# Altium PCB 最小系统.PcbDoc
Units mil, origin at the board's own origin, x right, y up, seen from the top; angles counter-clockwise.
Board outline 1430 x 800 mil, 2 copper layers (Top Layer, Bottom Layer); 28 components, 48 nets, 146 pads, 24 vias.
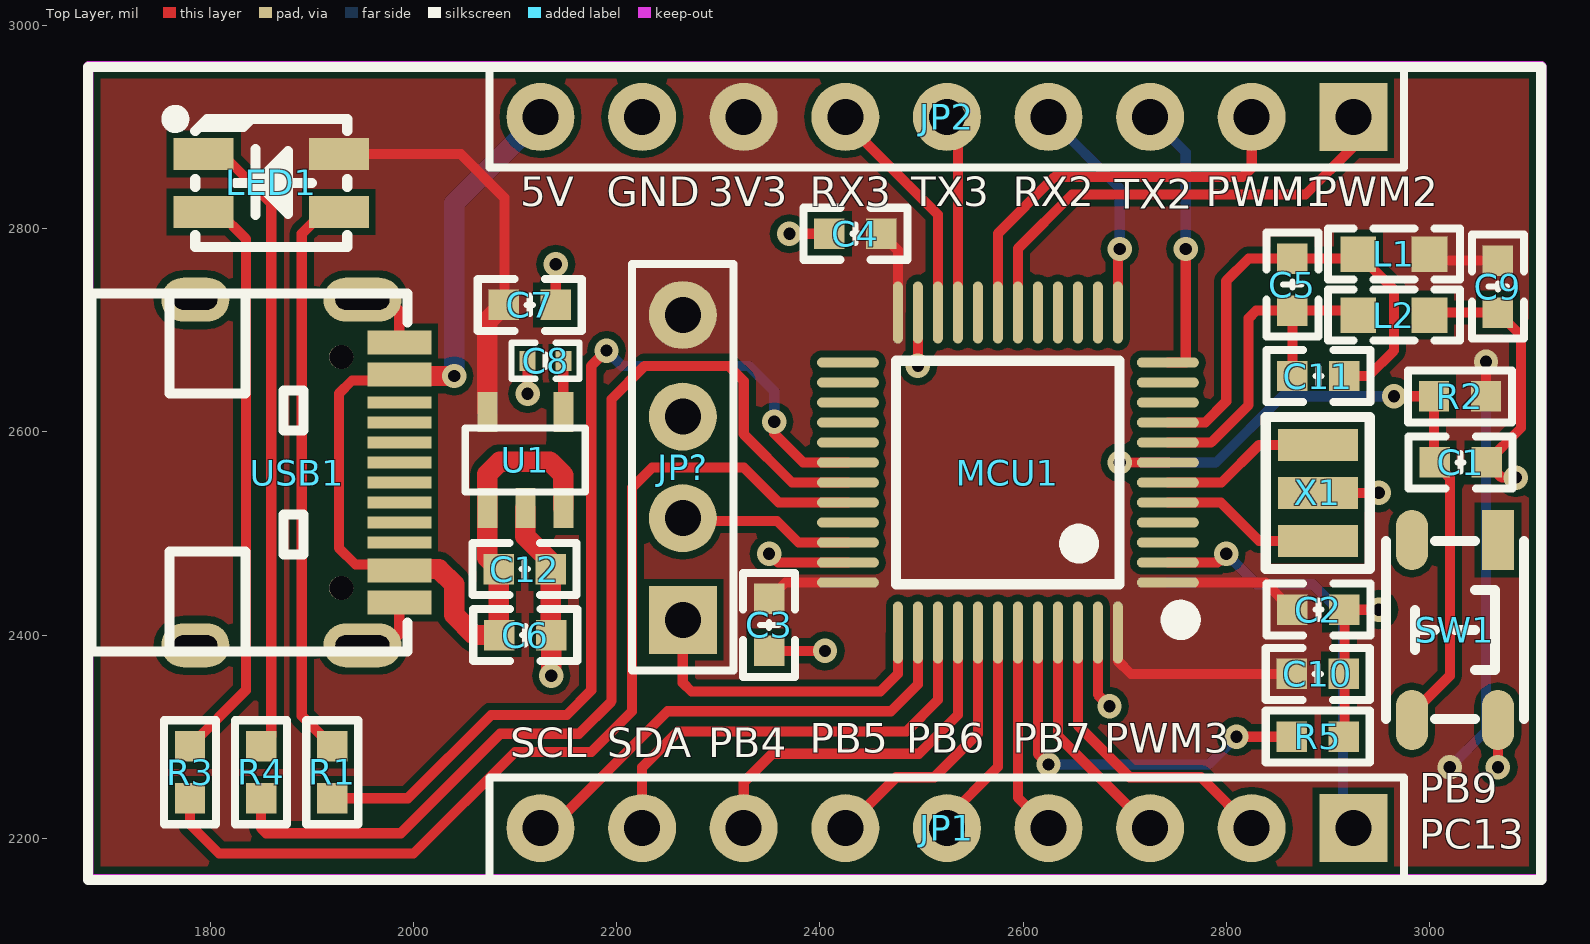
[diagram p0: Top Layer view]
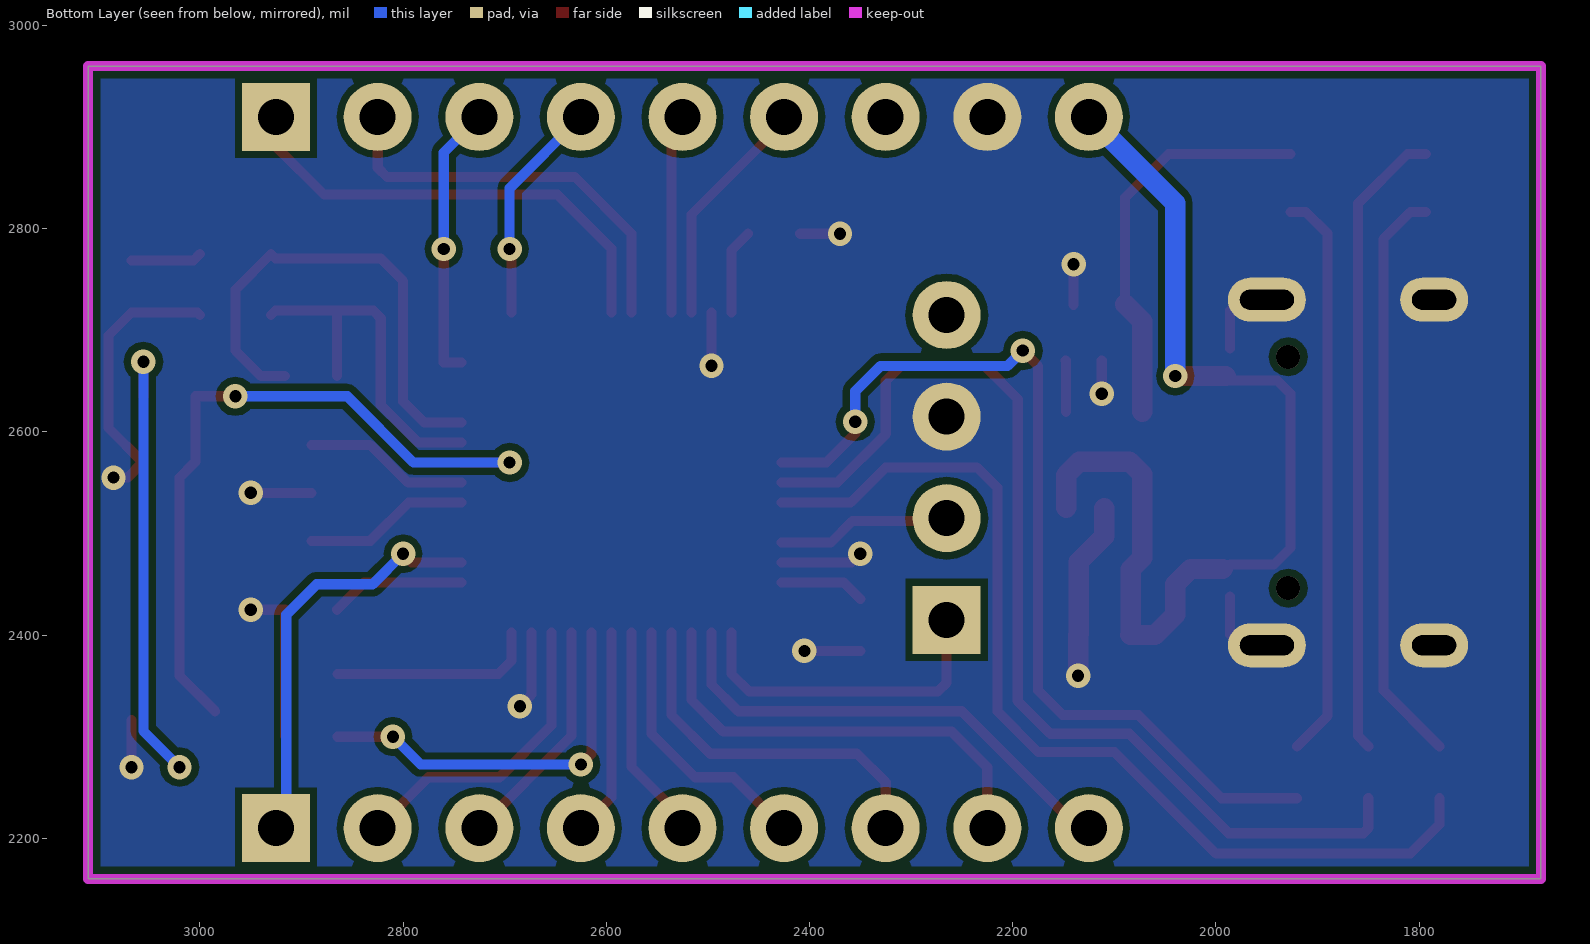
[diagram p1: Bottom Layer view, seen from below]

## Layer stack, top to bottom
Top Solder: solder mask 0.4, Solder Resist, Dk 3.5
Top Layer: signal copper 1.4
Dielectric 1: dielectric 12.6, FR-4, Dk 4.8
Bottom Layer: signal copper 1.4
Bottom Solder: solder mask 0.4, Solder Resist, Dk 3.5

## Board outline
1680,2160 1680,2960 3110,2960 3110,2160

## Design rules (kind name [scope] priority, off if disabled: settings)
Clearance [All] p1: gap=7 ignorepadtopadclearanceinfootprint=TRUE
PlaneConnect [All] p1: planeconnectstyle=Direct reliefexpansion=20 reliefentries=4 reliefconductorwidth=10 reliefairgap=10
PolygonConnect [All] p1: connectstyle=Direct reliefconductorwidth=10 reliefentries=4 polygonreliefangle="90 Angle" airgapwidth=10
RoutingVias [All] p1: holewidth=28 width=50 viastyle="Through Hole" minholewidth=28 minwidth=50 maxholewidth=28 maxwidth=50
SolderMaskExpansion [All] p1: expansion=4
Width [All] p1: maxlimit=1000 minlimit=10 preferedwidth=10 toplayer_maxwidth=100 minimp=50.000000 maximp=50.000000 favimp=50.000000
29 further rules are at their usual default settings.

## Components (designator, comment, footprint, x,y, rotation, side; value= is the part's Value field where it differs from the comment)
C1 "100nF/50V" "C 0603_L" 3030.59,2570 r0 top
C2 "4.7μF/35V" "C 0603_L" 2890.59,2425 r180 top
C3 "100nF/50V" "C 0603_L" 2350,2410 r90 top
C4 "100nF/50V" "C 0603_L" 2435,2795 r0 top
C5 "1μF/50V" "C 0603_L" 2865,2745 r90 top
C6 "1uF" "C 0603_L" 2110,2400 r0 top
C7 "1uF" "C 0603_L" 2114.41,2725 r0 top
C8 "22nF" "C 0402_L" 2130,2670 r180 top
C9 "1μF/50V" "C 0603_L" 3067.32,2743.06 r90 top
C10 "100nF/50V" "C 0603_L" 2890,2361.73 r180 top
C11 "100nF/50V" "C 0603_L" 2890.59,2655 r0 top
C12 "100nF/50V" "C 0603_L" 2109.41,2465 r0 top
JP1 "HDR-1X9" HDR2.54-LI-9P 2525,2210 r180 top locked
JP2 "HDR-1X9" HDR2.54-LI-9P 2525,2910 r180 top locked
JP? "HDR-1X4" HDR2.54-LI-4P 2265,2565 r90 top
L1 "0Ω" "L 0603" 2965,2775 r0 top
L2 "0Ω" "L 0603" 2965,2715 r0 top
LED1 "RGB" "LED 3528-RGB" 1860,2845 r0 top
MCU1 "STM32F103C8T6" "LQFP48 7X7_L" 2585,2560 r90 top
R1 "2K" "R 0603_L" 1920,2265 r90 top
R2 "10k" "R 0603_L" 3030,2635 r0 top
R3 "2K" "R 0603_L" 1780,2265 r90 top
R4 "2K" "R 0603_L" 1850,2265 r90 top
R5 "10k" "R 0603_L" 2890.01,2300 r0 top
SW1 "3.2x4.2x2.5" "TSW SMD-3.2*4.2*2.5" 3025,2405 r270 top
U1 "RT9193-33GB" SOT23-5 2072.6,2525 r0 top
USB1 "USB-C" USB-C/S_B 1860,2560 r270 top locked
X1 "8M" "OSC 3213-3P" 2890,2540 r270 top

## Footprints (in the part's own frame and the unit in brackets; to place one, negate y for a bottom-side part, rotate by r counter-clockwise, add the part's x,y. Pads: shape width x height; smd on the part's side, far side on the other; paste and mask are expansions set on the pad)
"C 0402_L" [mm] "无极性贴片电容"
  rect 0.4x0.5 smd: 1(-0.45,0) 2(0.45,0)
  silkscreen extent -0.85,-0.45 0.85,0.45, body extent -0.5,-0.26 0.5,0.26, height 0.53
"C 0603_L" [mil] "无极性贴片电容"
  rect 30x30 smd: 1(-25.59,0) 2(25.59,0)
  silkscreen extent -51,-26 51,26, body extent -31,-16 31,16, height 32
HDR2.54-LI-4P [mm] "排针，4脚"
  rect 1.7x1.7 hole 0.9: 1(-3.81,0)
  round 1.7 hole 0.9: 2(-1.27,0) 3(1.27,0) 4(3.81,0)
  silkscreen extent -5.08,-1.27 5.08,1.27, body extent -5.08,-1.27 5.08,1.27, height 8.5
HDR2.54-LI-9P [mm] "排针，9脚"
  rect 1.7x1.7 hole 0.9: 1(-10.16,0)
  round 1.7 hole 0.9: 2(-7.62,0) 3(-5.08,0) 4(-2.54,0) 5(0,0) 6(2.54,0) 7(5.08,0) 8(7.62,0) 9(10.16,0)
  silkscreen extent -11.43,-1.27 11.43,1.27, body extent -11.43,-1.27 11.43,1.27, height 8.5
"L 0603" [mil] "小功率贴片电感"
  rect 35x35 smd: 1(-35,0) 2(35,0)
  silkscreen extent -65,-25 65,25, body extent -31,-16 31,16, height 31
"LED 3528-RGB" [mm] "4脚，3528LED"
  rect 1.5x0.8 smd: 1(1.689,0.725) 2(1.689,-0.725) 3(-1.689,-0.725) 4(-1.689,0.725)
  silkscreen extent -2.5,-1.6 1.9,1.7, body extent -1.75,-1.4 1.75,1.4, height 1.9
"LQFP48 7X7_L" [mm] "48脚，体宽7x7mm，脚距0.5mm"
  oval 0.25x1.55 smd: 1(-2.75,-4) 2(-2.25,-4) 3(-1.75,-4) 4(-1.25,-4) 5(-0.75,-4) 6(-0.25,-4) 7(0.25,-4) 8(0.75,-4) 9(1.25,-4) 10(1.75,-4) 11(2.25,-4) 12(2.75,-4) 25(2.75,4) 26(2.25,4) 27(1.75,4) 28(1.25,4) 29(0.75,4) 30(0.25,4) 31(-0.25,4) 32(-0.75,4) 33(-1.25,4) 34(-1.75,4) 35(-2.25,4) 36(-2.75,4)
  oval 1.55x0.25 smd: 13(4,-2.75) 14(4,-2.25) 15(4,-1.75) 16(4,-1.25) 17(4,-0.75) 18(4,-0.25) 19(4,0.25) 20(4,0.75) 21(4,1.25) 22(4,1.75) 23(4,2.25) 24(4,2.75) 37(-4,2.75) 38(-4,2.25) 39(-4,1.75) 40(-4,1.25) 41(-4,0.75) 42(-4,0.25) 43(-4,-0.25) 44(-4,-0.75) 45(-4,-1.25) 46(-4,-1.75) 47(-4,-2.25) 48(-4,-2.75)
  silkscreen extent -3.93,-4.57 2.79,2.79, body extent -4.5,-4.5 4.5,4.5, height 1.45
"OSC 3213-3P" [mm] "内置电容晶振"
  rect 0.8x2 smd: 1(-1.2,0) 2(1.2,0) 3(0,0)
  silkscreen extent -1.9,-1.3 1.9,1.3, body extent -1.6,-0.65 1.6,0.65, height 1.02
"R 0603_L" [mil] "1/10W贴片电阻"
  rect 30x30 smd: 1(-25.59,0) 2(25.59,0)
  silkscreen extent -51,-26 51,26, body extent -31,-16 31,16, height 16
SOT23-5 [mm]
  rect 0.5x1 smd: 1(0,0) 2(0.95,0) 3(1.9,0) 4(1.9,2.4) 5(0,2.4)
  silkscreen extent -0.55,0.4 2.45,2, body extent -0.5,-0.2 2.4,2.6, height 1.09
"TSW SMD-3.2*4.2*2.5" [mm] "3.2*4.2*2.5mm"
  rect 1.5x0.8 smd: 1(-2.25,1.075)
  oval 1.5x0.8 smd: 2(-2.25,-1.075) 3(2.25,-1.075) 4(2.25,1.075)
  silkscreen extent -2.23,-1.72 2.23,1.72, body extent -2.3,-1.6 2.3,1.6, height 2.5
USB-C/S_B [mm] "Type-C接口，16P四固定插脚"
  oval 1.1x1.95 hole 0.5 slot 1.35 at 90 deg: 0(-4.32,2.28) 0(4.32,2.28)
  oval 1.1x1.7 hole 0.5 slot 1.1 at 90 deg: 0(-4.32,-1.9) 0(4.32,-1.9)
  round 0.6 hole 0.6: 100(-2.89,1.75) 100(2.89,1.75)
  rect 0.3x1.6 smd: A1(-3.4,3.2) A4(-2.6,3.2) A5(-1.25,3.2) A6(-0.25,3.2) A7(0.25,3.2) A8(1.25,3.2) A9(2.6,3.2) A12(3.4,3.2) B1(3.1,3.2) B4(2.3,3.2) B5(1.75,3.2) B6(0.75,3.2) B7(-0.75,3.2) B8(-1.75,3.2) B9(-2.3,3.2) B12(-3.1,3.2)
  silkscreen extent -4.47,-4.5 4.47,3.4, body extent -4.47,-4.5 4.47,3.4, height 3.21

## Part data
C1 C2 C3 C4 C5 C9 C10 C11: library part 无极贴片电容, "贴片电容"
C6 C7 C8 C12: library part C, "无极性贴片电容", BOM名称=无, 学习资源=www.oooc
JP1 JP2: library part "Header 9", "9P接插件", BOM名称=9P, 学习资源=www.oooc
JP?: library part "Header 4", "4P接插件", BOM名称=4P, 学习资源=www.oooc
L1 L2: library part 磁珠, "小功率贴片电感"
LED1: library part LED-RGB-A, "共阳三基色LED", BOM名称=三, 学习资源=www.oooc
MCU1: "STM32F103C8T6是一款由意法半导体公司（ST）推出的基于Cortex-M3内核的32位微控制器，硬件采用LQFP48封装，属于ST公司微控制器中的STM32系列。"
R1 R3 R4: library part R, "贴片电阻", BOM名称=Ì, 学习资源=www.oooc
R2 R5: library part 电阻, "贴片电阻1%精度"
SW1: library part "TSW SMD-3x4_D", "3.2x4.2轻触开关", BOM名称=3x6Ç, 学习资源=www.oooc
USB1: library part USB-C/S, "USB-C型母接口", BOM名称=USB-CÐ, 学习资源=www.oooc
X1: library part XTAL-3P, "3脚内置电容无源晶振"

## Via types
v1: diameter 24, hole 12, Top Layer to Bottom Layer, 24 vias

## Nets (pads, with @x,y where several pads share a name; then routed paths per layer and width w, separated by ;. In a path a pad name is that pad's centre, name@x,y a point inside that pad or via, vN(x,y) a via of type N, cw(c..) or ccw(c..) an arc to the next point about the centre after c; other vN are vias at no path point)
3.3VDDA: C5.2 C11.2 L1.1 MCU1.9 | length 494.4
  Top Layer w10: MCU1.9 2779.21,2609.21 2800,2630 2800,2748.65 2821.94,2770.59 C5.2 2925.59,2770.59 L1.1 2965,2740 2965,2680 2939.99,2654.99 C11.2
3V3: C2.2 C3.2 C4.2 C7.1 C9.2 C10.2 JP2.7 JP?.4 L1.2 LED1.1 MCU1.1 MCU1.24 MCU1.36 MCU1.48 R2.2 U1.5 | length 1423.3
  Top Layer w10: LED1.1 2046.46,2873.54 2089.41,2830.59 C7.1@2089.41,2725.59 ; C7.1@2088.73,2724.91 2088.82,2724.83 C7.1 ; C3.2 2366.15,2451.73 MCU1.36 ; C4.2 2476.73,2778.85 MCU1.24 ; MCU1.48 2693.27,2374.72 2706.26,2361.74 C10.2 ; MCU1.1 2838.27,2451.73 C2.2 ; L1.2 3006.35,2768.65 C9.2 ; R2.2 v1(3055.59,2669.09)
  Top Layer w20: U1.5 2072.6,2708.78 2088.73,2724.91 C7.1 C7.1@2089.41,2725.59
  Bottom Layer w10: v1(3020,2270) 3055.59,2305.59 v1(3055.59,2669.09)
A00_P10: MCU1.10
A01_P11: MCU1.11
A02_P12: JP2.3 MCU1.12 | length 273.8
  Top Layer w10: MCU1.12 2760,2668.27 v1(2760,2780)
  Bottom Layer w10: JP2.3 2760,2875 v1(2760,2780)
A03_P13: JP2.4 MCU1.13 | length 222.4
  Top Layer w10: MCU1.13 2693.27,2778.11 v1(2695.16,2780)
  Bottom Layer w10: JP2.4 2695.16,2839.84 v1(2695.16,2780)
A04_P14: MCU1.14
A05_P15: MCU1.15
A06_P16: MCU1.16
A07_P17: MCU1.17
A08_P29: MCU1.29
A09_P30: MCU1.30 R1.1 | length 947.1
  Top Layer w10: R1.1 1994.41,2239.41 2076.37,2321.37 2150.79,2321.37 2175,2345.58 2175,2665 v1(2190,2680) ; v1(2355,2610) 2355,2598.39 2383.55,2569.84 MCU1.30
  Bottom Layer w10: v1(2190,2680) 2205,2665 2330,2665 2355,2640 v1(2355,2610)
A10_P31: MCU1.31 R4.1 | length 1051.9
  Top Layer w10: R4.1 1850,2210 1855,2205 1987.4,2205 2085.27,2302.87 2162.87,2302.87 2195,2335 2195,2632.36 2227.64,2665 2310,2665 2325,2650 2325,2597.75 2372.59,2550.16 MCU1.31
A11_P32: MCU1.32 R3.1 | length 985.8
  Top Layer w10: R3.1 1780,2213.54 1808.54,2185 2000,2185 2100,2285 2175,2285 2215,2325 2215,2545 2235,2565 2325,2565 2359.53,2530.47 MCU1.32
A12_P33: MCU1.33
A13_P34: JP?.2 MCU1.34 | length 172.4
  Top Layer w10: JP?.2 2267.75,2512.25 2357.75,2512.25 2378.9,2491.1 MCU1.34
A14_P37: JP?.1 MCU1.37 | length 325.3
  Top Layer w10: JP?.1 2265,2352.99 2273.59,2344.41 2459.41,2344.41 2476.73,2361.73 MCU1.37
A15_P38: JP1.9 MCU1.38 | length 481.1
  Top Layer w10: JP1.9 2135,2210 2250,2325 2470,2325 2496.42,2351.42 MCU1.38
B00_P18: JP2.1 MCU1.18 | length 463.8
  Top Layer w10: MCU1.18 2594.84,2780.32 2648.18,2833.65 2877.87,2833.65 2925,2880.78 JP2.1
B01_P19: JP2.2 MCU1.19 | length 404.4
  Top Layer w10: MCU1.19 2575.16,2795.16 2630.8,2850.8 2815.8,2850.8 2825,2860 JP2.2
B02_P20: MCU1.20
B03_P39: JP1.8 MCU1.39 | length 444.9
  Top Layer w10: JP1.8 2225,2270 2260,2305 2485,2305 2516.1,2336.1 MCU1.39
B04_P40: JP1.7 MCU1.40 | length 364.4
  Top Layer w10: JP1.7 2325,2255 2353.19,2283.19 2497.6,2283.19 2535.79,2321.37 MCU1.40
B05_P41: JP1.6 MCU1.41 | length 268.6
  Top Layer w10: JP1.6 2475,2260 2512.6,2260 2555.47,2302.87 MCU1.41
B06_P42: JP1.5 MCU1.42 | length 213.3
  Top Layer w10: JP1.5 2525,2220 2575.16,2270.16 MCU1.42
B07_P43: JP1.4 MCU1.43 | length 215
  Top Layer w10: MCU1.43 2594.84,2240.16 JP1.4 JP1.4@2625,2200
B08_P45: JP1.3 MCU1.45 | length 230.1
  Top Layer w10: MCU1.45 2634.21,2300.79 JP1.3
B09_P46: JP1.2 MCU1.46 | length 304.4
  Top Layer w10: MCU1.46 2653.9,2311.1 2705,2260 2775,2260 JP1.2
B10_P21: JP2.5 MCU1.21 | length 197
  Top Layer w10: JP2.5 2535.79,2899.21 MCU1.21
B11_P22: JP2.6 MCU1.22 | length 230.3
  Top Layer w10: JP2.6 2425,2905 2516.1,2813.9 MCU1.22
B12_P25: MCU1.25
B13_P26: MCU1.26
B14_P27: MCU1.27
B15_P28: MCU1.28
BOOT0: MCU1.44 R5.1 | length 385
  Top Layer w10: MCU1.44 2614.53,2283.07 v1(2625,2272.6) ; v1(2810,2300) R5.1
  Bottom Layer w10: v1(2625,2272.6) 2782.6,2272.6 v1(2810,2300)
C13_P02: JP1.1 MCU1.2 | length 420.9
  Top Layer w10: MCU1.2 2791.42,2471.42 v1(2800,2480)
  Bottom Layer w10: v1(2800,2480) 2830,2450 2885,2450 2915,2420 2915,2210 JP1.1
C14_P03: MCU1.3
C15_P04: MCU1.4
GND: C1.2 C2.1 C3.1 C4.1 C6.2 C7.2 C8.2 C9.1 C10.1 C12.2 JP2.8 JP?.3 L2.2 MCU1.23 MCU1.35 MCU1.47 R5.2 SW1.4 U1.2 USB1.0 USB1.A1 USB1.A12 USB1.B1 USB1.B12 X1.3 | length 1249
  Top Layer w10: USB1.0@1949.76,2389.92 1975.35,2389.92 1985.98,2400.55 USB1.A12 USB1.B1 ; USB1.0@1949.76,2730.08 1975.35,2730.08 1985.98,2719.45 USB1.A1 USB1.B12 ; v1(2112.29,2637.6) C8.2 ; C7.2 v1(2140,2765) ; C3.1 v1(2405,2384.41) ; v1(2350,2480) 2358.58,2471.42 MCU1.35 ; v1(2370,2795) C4.1 ; v1(2496.42,2665) MCU1.23 ; MCU1.47 2673.58,2341.42 v1(2685,2330) ; X1.3 v1(2950,2540) ; R5.2 2916.18,2300.59 C2.1 v1(2950,2425) ; L2.2 3002.46,2717.46 C9.1 3090,2694.79 3090,2603.82 C1.2 3071.18,2555 v1(3085,2555) ; v1(3067.32,2270) SW1.4
  Top Layer w20: U1.2 2110,2497.29 2135,2472.29 C12.2 2135,2400.58 C6.2 v1(2135.59,2360)
NetC8_1: C8.1 U1.4 | length 50.6
  Top Layer w10: U1.4 2147.4,2669.69 C8.1
NetLED1_2: LED1.2 R1.2 | length 562.2
  Top Layer w10: R1.2 1890,2320.59 1890,2795 1911.46,2816.46 LED1.2
NetLED1_3: LED1.3 R3.2 | length 574.7
  Top Layer w10: R3.2 1835,2345.58 1835,2790 1808.54,2816.46 LED1.3
NetLED1_4: LED1.4 R4.2 | length 625.2
  Top Layer w10: LED1.4 1811.46,2873.54 1860,2825 1860,2300.58 R4.2
NRST: C1.1 MCU1.7 R2.1 SW1.3 | length 714.5
  Top Layer w10: v1(2695.16,2569.84) MCU1.7 ; v1(2965,2635) R2.1 3004.41,2570.59 C1.1 3020,2555 3020,2360 SW1.3@2985,2325
  Bottom Layer w10: v1(2695.16,2569.84) 2789.84,2569.84 2855,2635 v1(2965,2635)
OSC_IN: MCU1.5 X1.2 | length 163.2
  Top Layer w10: MCU1.5 2794.53,2530.47 2832.25,2492.75 X1.2
OSC_OUT: MCU1.6 X1.1 | length 162.9
  Top Layer w10: MCU1.6 2795.31,2550.16 2832.4,2587.24 X1.1
VCC: C6.1 C12.1 JP2.9 U1.1 U1.3 USB1.A4 USB1.A9 USB1.B4 USB1.B9 | length 1039.3
  Top Layer w10: USB1.B4 1942.84,2469.45 1926.5,2485.79 1926.5,2637.6 1939.45,2650.55 USB1.B9
  Top Layer w20: USB1.B9@1990.43,2655 v1(2040,2655) ; USB1.B4@1993.35,2465 2025,2465 2040,2450 2040,2420 2060,2400 C6.1 2083.82,2400.58 C12.1 2072.6,2476.22 U1.1 2072.6,2558.19 2085,2570.59 2134.41,2570.59 2147.4,2557.6 U1.3
  Bottom Layer w20: v1(2040,2655) 2040,2825 JP2.9
VSSA: C5.1 C11.1 L2.1 MCU1.8 | length 357.7
  Top Layer w10: MCU1.8 2785.04,2589.53 2821.94,2626.43 2821.94,2711.94 2829.41,2719.41 C5.1 ; C11.1 C5.1 ; L2.1 2925.59,2719.41 C5.1
pads on no net: SW1.1 SW1.2 USB1.100 USB1.A5 USB1.A6 USB1.A7 USB1.A8 USB1.B5 USB1.B6 USB1.B7 USB1.B8

## Polygon pours and split planes (outlines as drawn)
GND on Bottom Layer "Top Layer-No Net1" (solid, remove dead copper, pour order 1): 1680,2160 1680,2960 3110,2960 3110,2160
3V3 on Top Layer "Top Layer-No Net" (solid, remove dead copper, pour order 2): 1680,2160 1680,2960 3110,2960 3110,2160

## Keep-outs
Keep-Out Layer:
  the board outline again, w10

## Silkscreen, mask and mechanical layers (free items; w line width, h text height)
Top Overlay:
  lines w10: 1679.72,2159.09 1679.72,2959.09 3110,2959.09 3110,2159.09 1679.72,2159.09
  text "5V" at 2105,2812.24 h50
  text "GND" at 2190,2812.24 h50
  text "3V3" at 2290,2812.24 h50
  text "RX3" at 2390,2812.24 h50
  text "TX3" at 2490,2812.24 h50
  text "RX2" at 2590,2812.24 h50
  text "PWM1" at 2780,2812.24 h50
  text "PWM2" at 2885,2812.24 h50
  text "TX2" at 2690,2810 h50
  text "PB5" at 2390,2274.41 h50
  text "PB6" at 2485,2274.41 h50
  text "PB7" at 2590,2274.41 h50
  text "PWM3" at 2680,2274.41 h50
  text "SCL" at 2095,2270 h50
  text "SDA" at 2190.59,2270 h50
  text "PB4" at 2290,2270 h50
  text "PB9" at 2990,2225 h50
  text "PC13" at 2990,2180 h50